# Altium PCB Breadboard Power Module.PcbDoc
Units mm, origin at the board's own origin, x right, y up, seen from the top; angles counter-clockwise.
Board outline 52.8 x 32.65 mm, 2 copper layers (Top Layer, Bottom Layer); 21 components, 10 nets, 60 pads, 24 vias.
Unrouted connection lines stored in the file: 31.
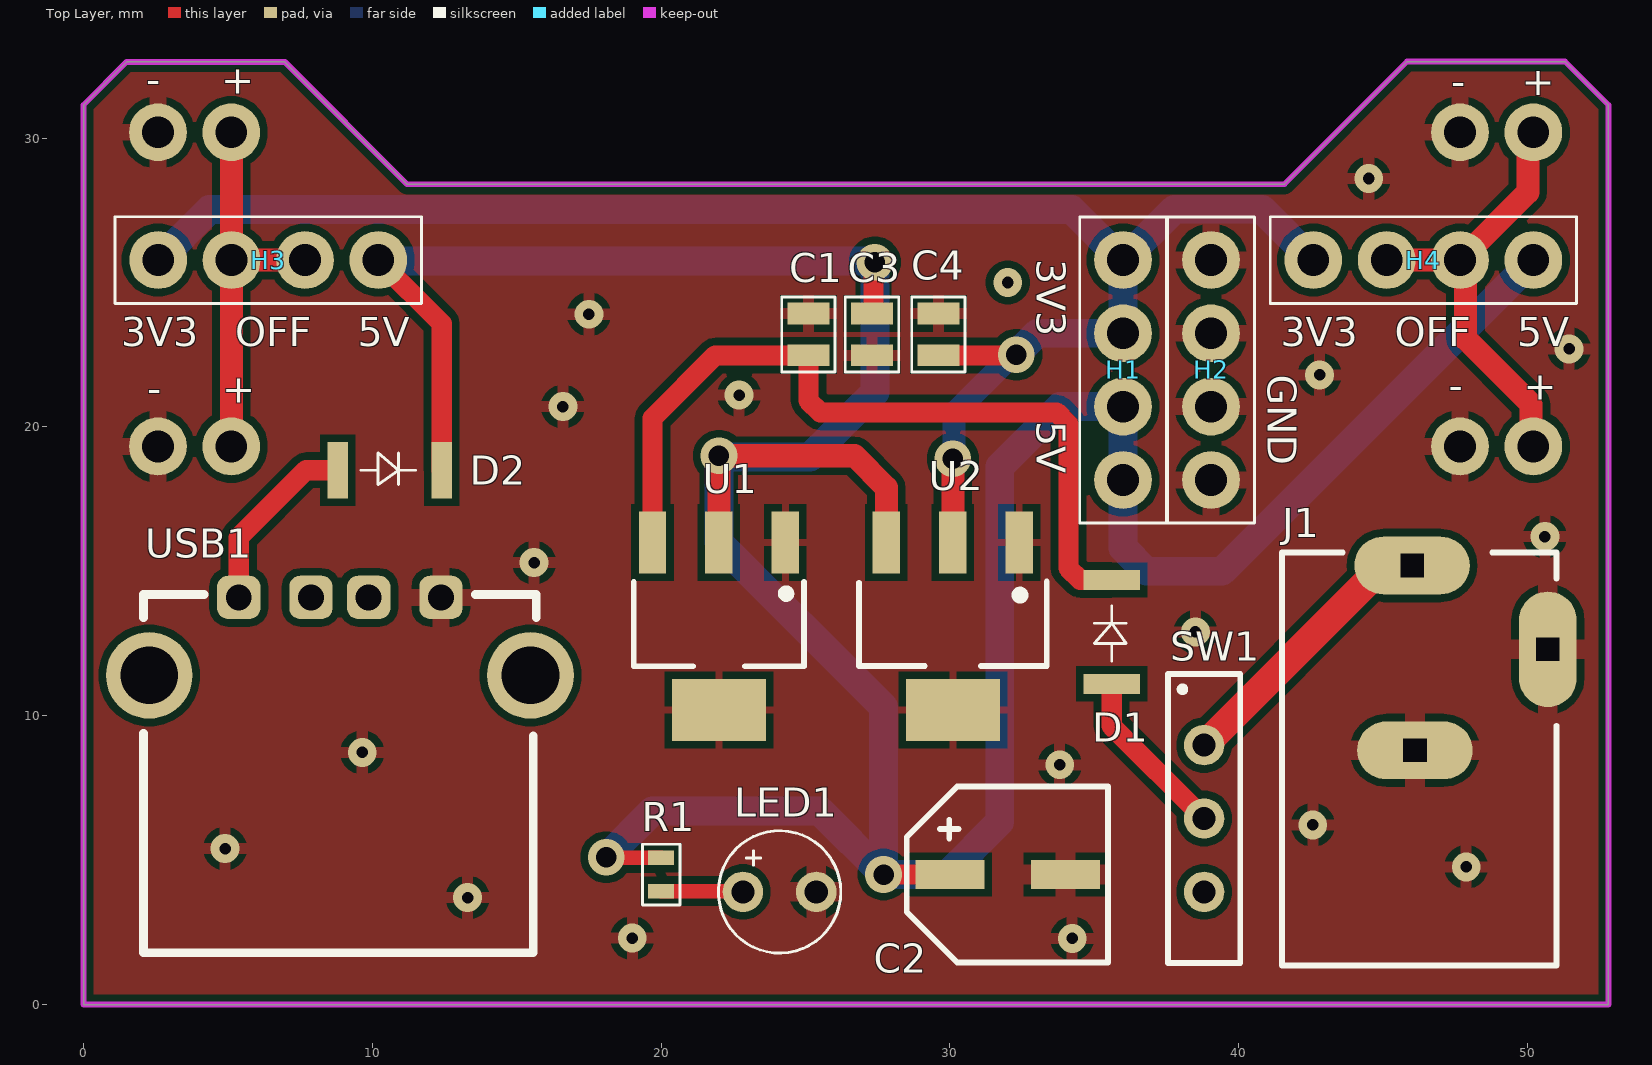
[diagram p0: Top Layer view]
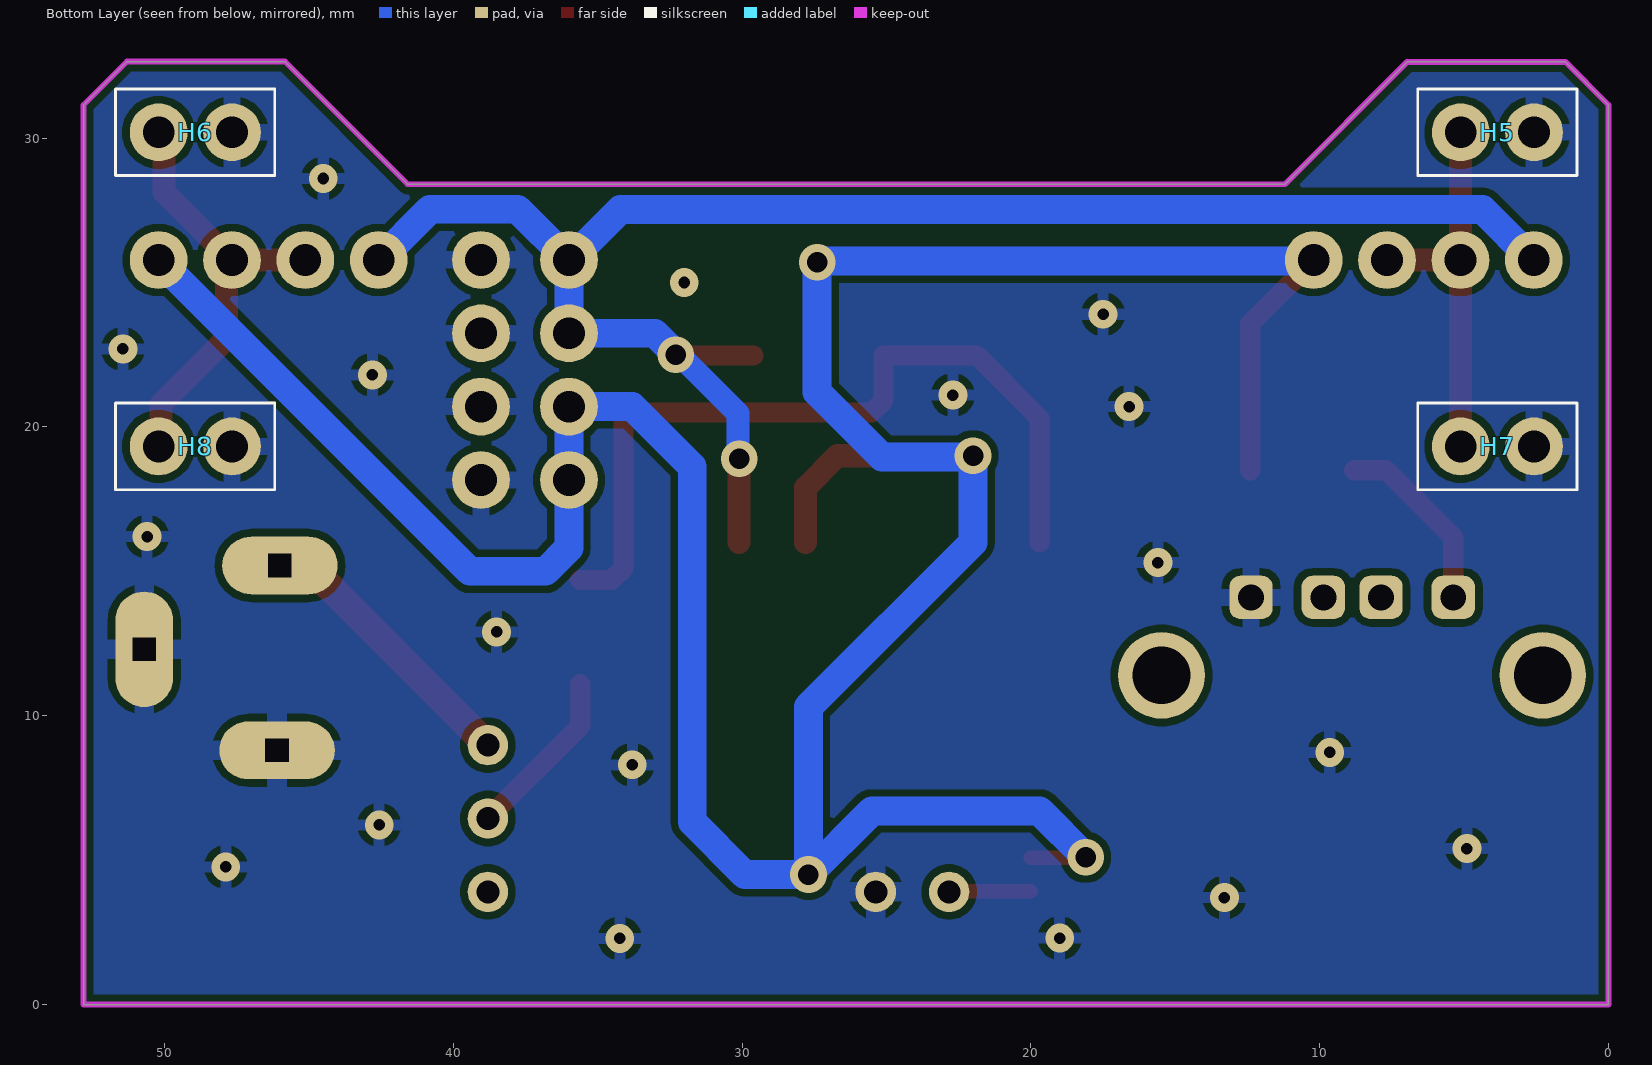
[diagram p1: Bottom Layer view, seen from below]

## Layer stack, top to bottom
Top Solder: solder mask 0.0102, Solder Resist, Dk 3.5
Top Layer: signal copper 0.0356
Dielectric 1: dielectric 0.32, FR-4, Dk 4.8
Bottom Layer: signal copper 0.0356
Bottom Solder: solder mask 0.0102, Solder Resist, Dk 3.5

## Board outline
0,0 0,31.15 1.489,32.639 6.964,32.639 11.203,28.4 41.575,28.4 41.586,28.411 45.825,32.65 51.3,32.65 52.8,31.15 52.8,0

## Design rules (kind name [scope] priority, off if disabled: settings)
Clearance [All] p1: gap=0.254 ignorepadtopadclearanceinfootprint=FALSE except(0: Arc-Hole Track-Hole SMDPad-Hole THPad-Hole Via-Hole Fill-Hole Poly-Hole Region-Hole Text-Hole)
PolygonConnect [All] p1: connectstyle=Relief reliefconductorwidth=0.254 reliefentries=4 polygonreliefangle="90 Angle" airgapwidth=0.254
RoutingVias [All] p1: holewidth=0.711 width=1.27 viastyle="Through Hole" minholewidth=0.711 minwidth=1.27 maxholewidth=0.711 maxwidth=1.27
SolderMaskExpansion [All] p1: expansion=0.102 istentingtop=FALSE
Width [All] p1: maxlimit=20 minlimit=0.254 preferedwidth=1 minimp=50.000000 maximp=50.000000 favimp=50.000000
30 further rules are at their usual default settings.

## Components (designator, comment, footprint, x,y, rotation, side; value= is the part's Value field where it differs from the comment)
C1 "CC0805KRX7R9BB104" "CAP 0805" 25.1,23.2 r270 top value=0.1uF
C2 "EEH-ZC1V470P" "CAP ALUM" 32,4.5 r0 top value=47uF
C3 "CC0805KRX7R9BB104" "CAP 0805" 27.3,23.2 r90 top value=0.1uF
C4 "CC0805KRX7R9BB104" "CAP 0805" 29.6,23.2 r270 top value=100nF
D1 "MBR230LSFT1G" DIODE 35.6,12.9 r90 top value=6pF
D2 "MBR230LSFT1G" DIODE 10.6,18.5 r0 top value=6pF
H1 "61300411121" "HEADER 4 POS" 35.993,21.971 r90 top
H2 "61300411121" "HEADER 4 POS" 39.041,21.971 r90 top
H3 "61300411121" "HEADER 4 POS" 6.395,25.775 r180 top
H4 "61300411121" "HEADER 4 POS" 46.39,25.775 r180 top
H5 "61300211121" "HEADER 2 POS" 3.845,30.2 r180 bottom
H6 "61300211121" "HEADER 2 POS" 48.93,30.2 r180 bottom
H7 "61300211121" "HEADER 2 POS" 3.845,19.325 r180 bottom
H8 "61300211121" "HEADER 2 POS" 48.93,19.325 r180 bottom
J1 "54-00167" "POWER JACK" 44.7,11.6 r270 top
LED1 "151031VS06000" "LED DIODE" 24.1,3.9 r0 top
R1 "RC0603JR-07180RL" "RES 0603" 20,4.5 r90 top value=180R
SW1 "450301014042" "SLIDE SWITCH" 38.8,6.44 r270 top
U1 "AMS1117-5.0" "LDO 5V" 22,13.1 r180 top
U2 "AMS1117-3.3" "LDO 3V3" 30.1,13.1 r180 top
USB1 "USB-A1HSW6" USB 8.874,14.097 r0 top

## Footprints (in the part's own frame and the unit in brackets; to place one, negate y for a bottom-side part, rotate by r counter-clockwise, add the part's x,y. Pads: shape width x height; smd on the part's side, far side on the other; paste and mask are expansions set on the pad)
"CAP 0805" [mm]
  rect 0.75x1.45 smd mask+0.102: 1(-0.725,0) 2(0.725,0)
  silkscreen extent -1.3,-0.92 1.3,0.92, body extent -1,-0.61 1,0.61, height 0.71
"CAP ALUM" [mm]
  rect 2.4x1 smd mask+0.05: 1(-2,0) 2(2,0)
  silkscreen extent -3.5,-3.05 3.47,3.05, body extent -3,-2.65 3,2.65, height 5.8
DIODE [mm]
  rect 0.7x1.95 smd mask+0.102: 1(-1.8,0) 2(1.8,0)
  silkscreen extent -1,-0.5 0.9,0.6, body extent -1.93,-0.98 1.93,0.98, height 1.4
"HEADER 2 POS" [mm]
  round 2 hole 1.1 mask+0.102: 1(-1.27,0) 2(1.27,0)
  silkscreen extent -2.76,-1.5 2.75,1.5, body extent -2.54,-1.27 2.54,1.27, height 8.57
"HEADER 4 POS" [mm]
  round 2 hole 1.1 mask+0.102: 1(-3.81,0) 2(-1.27,0) 3(1.27,0) 4(3.81,0)
  silkscreen extent -5.3,-1.5 5.3,1.5, body extent -5.08,-1.27 5.08,1.27, height 8.57
"LDO 3V3" [mm]
  rect 0.95x2.15 smd mask+0.102: 1(-2.3,-2.9) 2(0,-2.9) 3(2.3,-2.9)
  rect 3.25x2.15 smd mask+0.102: 1(0,2.9)
  silkscreen extent -3.25,-1.55 3.25,1.38, body extent -3.25,-3.5 3.25,3.5, height 1.8
"LDO 5V" [mm]
  rect 0.95x2.15 smd mask+0.102: 1(-2.3,-2.9) 2(0,-2.9) 3(2.3,-2.9)
  rect 3.25x2.15 smd mask+0.102: 1(0,2.9)
  silkscreen extent -2.95,-1.53 2.95,1.39, body extent -3.25,-3.5 3.25,3.5, height 1.8
"LED DIODE" [mm]
  round 1.4 hole 0.8 mask+0.102: 1(-1.27,0) 2(1.27,0)
  silkscreen extent -2.12,-2.12 2.12,2.12, body extent -1.92,-1.92 1.65,1.92, height 5.5
"POWER JACK" [mm]
  oval 2x4 hole 0.8 square mask+0.05: 1(-3.6,1.3) 2(2.8,1.4)
  oval 4x2 hole 0.8 square mask+0.05: 3(-0.7,6)
  silkscreen extent -4.05,-3.2 10.25,6.3, body extent -4.05,-3.2 10.25,6.3, height 11
"RES 0603" [mm]
  rect 0.5x0.9 smd mask+0.102: 1(-0.575,0) 2(0.575,0)
  silkscreen extent -1.05,-0.65 1.05,0.65, body extent -0.77,-0.4 0.77,0.4, height 0.44
"SLIDE SWITCH" [mm]
  round 1.4 hole 0.8 mask+0.102: 1(-2.54,0) 2(0,0) 3(2.54,0)
  silkscreen extent -5,-1.25 5,1.25, body extent -5,-1.25 5,1.25, height 6.4
USB [mm]
  rrect50% 1.5x1.5 hole 0.9 mask+0.102: 1(-3.5,0) 2(-1,0) 3(1,0) 4(3.5,0)
  round 3 hole 2 mask+0.102: 5(-6.6,-2.7) 6(6.6,-2.7)
  silkscreen extent -6.8,-12.3 6.8,0.1, body extent -7.9,-13 7.9,1.1, height 7.6

## Part data
C1 C3 C4: library part "CAP CER 0.1uF 0805", "CAP CER 0.1UF 50V X7R 0805", Case Code (Metric)=2012, Case Code (Imperial)=0805, Dielectric=X7R, Manufacturer=Yageo, Max Operating Temperature=125°C, Min Operating Temperature=-55°C, Package Quantity=4000, Supplier Part Number=311-1140-1-ND, Tolerance=10%, Voltage=50V, Insulation Resistance=100GR, Case/Package=0805, Category="Ceramic Capacitors", ComponentLink1Description=https://datasheet.ciiva.com/11786/0900766b80d84f1d-11786009.pdf?src-supplier=Rs, ComponentLink1URL=https://datasheet.ciiva.com/11786/0900766b80d84f1d-11786009.pdf?src-supplier=Rs, ComponentLink2Description=https://datasheet.ciiva.com/46393/1734573-46393307.pdf?src-supplier=Element14, ComponentLink2URL=https://datasheet.ciiva.com/46393/1734573-46393307.pdf?src-supplier=Element14, ComponentLink3Description=https://datasheet.ciiva.com/155/mlccorderingcode-155930.pdf?src-supplier=Digikey, ComponentLink3URL=https://datasheet.ciiva.com/155/mlccorderingcode-155930.pdf?src-supplier=Digikey, ComponentLink4Description=https://datasheet.ciiva.com/28450/1489800-28450805.pdf?src-supplier=Element14, ComponentLink4URL=https://datasheet.ciiva.com/28450/1489800-28450805.pdf?src-supplier=Element14, ComponentLink5Description=https://datasheet.ciiva.com/155/mlccorderingcode-155929.pdf?src-supplier=Digikey, ComponentLink5URL=https://datasheet.ciiva.com/155/mlccorderingcode-155929.pdf?src-supplier=Digikey, ComponentLink6Description=https://datasheet.ciiva.com/155/mlccorderingcode-155931.pdf?src-supplier=Digikey, ComponentLink6URL=https://datasheet.ciiva.com/155/mlccorderingcode-155931.pdf?src-supplier=Digikey, ComponentLink7Description=https://datasheet.ciiva.com/11464/upy-gphc-x7r-6-3v-to-50v-8-11464757.pdf?src-supplier=Avnet, ComponentLink7URL=https://datasheet.ciiva.com/11464/upy-gphc-x7r-6-3v-to-50v-8-11464757.pdf?src-supplier=Avnet, ComponentLink8Description=https://datasheet.ciiva.com/29242/445210-da-01-en-kerko-chip-0805-x7r-0-1uf-10proz-50vg-29242074.pdf?src-supplier=Conrad, ComponentLink8URL=https://datasheet.ciiva.com/29242/445210-da-01-en-kerko-chip-0805-x7r-0-1uf-10proz-50vg-29242074.pdf?src-supplier=Conrad, Depth=1.25mm, Halogen Free=5694HalogenFree, Height=0.85mm, Lead Free=5697LeadFree, Length=2mm, Manufacturer Part Number=CC0805KRX7R9BB104, Material=Ceramic, Mounting Technology="Surface Mount", Packaging="Tape and Reel", Pins=2, Pricing="1=0,1, 10=0,058, 50=0,0396, 100=0,0341, 500=0,0248, 1000=0,02191, 4000=0,01754, 8000=0,01591, 12000=0,01509, 20000=0,01417, 28000=0,01364, 40000=0,01312, 100000=0,012, 200000=0,01132, 400000=0,01076 (USD)", Radiation Hardening=No, Reach SVHC Compliant=No, RoHS=Yes, RoHS Compliant=Yes, Series=CC, Stock=4302952, Supplier=Digikey, Termination=SMD/SMT, Voltage Rating=50V
C2: library part "CAP ALUM 47uF SMD", "CAP ALUM 47UF 20% 35V SMD"
D1 D2: library part "DIODE SMD", "DIODE SCHOTTKY 30V 2A", Forward Current=1A, Manufacturer="Sangdest Microelectronics", Manufacturer Part Number=1N4007FL, Max Forward Surge Current (Ifsm)=30A, Max Operating Temperature=150°C, Max Repetitive Reverse Voltage (Vrrm)=1kV, Max Reverse Current=5uA, Min Operating Temperature=-55°C, Supplier Part Number=1655-1N4007FLCT-ND, Category=Diodes, Height=1.1mm, Pricing="1=0,1, 10=0,058, 100=0,039, 500=0,02954, 1000=0,02627 (USD)", Reverse Voltage=1kV, RoHS=No, Stock=333059, Supplier=Digikey
H1 H2 H3 H4: library part "HEADER TH 4 POS", "CONN HEADER VERT 4POS 2.54MM", Color=Black, Contact Resistance=20mR, Current Rating=3A, Manufacturer="Wurth Electronics", Max Operating Temperature=105°C, Min Operating Temperature=-40°C, Operating Supply Voltage=250V, Supplier Part Number=732-5317-ND, Category="Headers and Wire Housings", ComponentLink1Description=http://www.farnell.com/cad/1737268.pdf?src-supplier=Element14, ComponentLink1URL=http://www.farnell.com/cad/1737268.pdf?src-supplier=Element14, ComponentLink2Description=https://datasheet.octopart.com/61300411121-W%C3%BCrth-Elektronik-datasheet-21154836.pdf?src-supplier=Element14, ComponentLink2URL=https://datasheet.octopart.com/61300411121-W%C3%BCrth-Elektronik-datasheet-21154836.pdf?src-supplier=Element14, ComponentLink3Description=https://katalog.we-online.de/em/datasheet/6130xx11121.pdf?src-supplier=Digikey, ComponentLink3URL=https://katalog.we-online.de/em/datasheet/6130xx11121.pdf?src-supplier=Digikey, Contact Material=Copper, Contact Mating Length=0.236inch, Contact Plating=Gold, Contact Type="Male Pin", Gender=29Gender, Height=8.89mm, Lead Free=5697LeadFree, Manufacturer Part Number=61300411121, Mounting Technology="Through Hole", Number of Contacts=4, Number of Positions=4, Number of Rows=1, Orientation=5495OrientationType, Packaging=Bulk, Pitch=0.1inch, Pricing="1=0,19, 10=0,163, 25=0,1352, 50=0,113, 100=0,102, 1000=0,094 (USD)", Reach SVHC Compliant=Unknown, RoHS=Yes, RoHS Compliant=Yes, Series=WR-PHD, Stock=35642, Supplier=Digikey, Termination=Solder, Voltage Rating=250V
H5 H6 H7 H8: library part "HEADER TH 2 POS", "CONN HEADER VERT 2POS 2.54MM"
J1: library part "POWER JACK", "CONN JACK R/A PCB 5.5X2.5MM", ComponentLink1Description=https://datasheet.ciiva.com/26837/getdatasheetpartid-572408-26837414.pdf?src-supplier=Verical, ComponentLink1URL=https://datasheet.ciiva.com/26837/getdatasheetpartid-572408-26837414.pdf?src-supplier=Verical, ComponentLink2Description=https://datasheet.ciiva.com/16318/typ-4840-1200-16318967.pdf?src-supplier=Future+Electronics, ComponentLink2URL=https://datasheet.ciiva.com/16318/typ-4840-1200-16318967.pdf?src-supplier=Future+Electronics, ComponentLink3Description=https://datasheet.ciiva.com/12342/typ-4840-2201-65401-12342879.pdf?src-supplier=Mouser, ComponentLink3URL=https://datasheet.ciiva.com/12342/typ-4840-2201-65401-12342879.pdf?src-supplier=Mouser, ComponentLink4Description=https://datasheet.ciiva.com/391/typ-4840-2201-391834.pdf?src-supplier=Digikey, ComponentLink4URL=https://datasheet.ciiva.com/391/typ-4840-2201-391834.pdf?src-supplier=Digikey
LED1: library part "GREEN LED TH", "LED GREEN 3MM ROUND T/H", Case/Package=Radial, Color=Green, Forward Current=30mA, Forward Voltage=2.2V, Manufacturer="Wurth Electronics", Max Operating Temperature=85°C, Max Reverse Voltage (DC)=5V, Min Operating Temperature=-40°C, Supplier Part Number=732-5008-ND, Test Current=20mA, Category=LEDs, ComponentLink1Description=https://datasheet.ciiva.com/22657/151031vs06000-22657015.pdf?src-supplier=Element14, ComponentLink1URL=https://datasheet.ciiva.com/22657/151031vs06000-22657015.pdf?src-supplier=Element14, ComponentLink2Description=https://datasheet.ciiva.com/29363/759487-da-01-en-tht-led-3mm-b-gruen-151031vs06000-29363829.pdf?src-supplier=Conrad, ComponentLink2URL=https://datasheet.ciiva.com/29363/759487-da-01-en-tht-led-3mm-b-gruen-151031vs06000-29363829.pdf?src-supplier=Conrad, Dominant Wavelength=568nm, Height=5.55mm, Lead Free="Lead Free", Length=3mm, Lens Color=Green, Lens Size=3mm, Lens Style=Round,Domed,Circular, Lens Transparency=Diffused, Luminous Intensity=30mcd, Manufacturer Part Number=151031VS06000, Mounting Technology="Through Hole", Pricing="1=0,16, 50=0,155, 100=0,133, 500=0,115 (USD)", Reach SVHC Compliant=Unknown, RoHS=Yes, RoHS Compliant=Yes, Series=WL-TMRC, Stock=21165, Supplier=Digikey, Viewing Angle=60°, Wavelength=568nm, Width=3mm
R1: library part "RES 180 OHM 0603", "RES 180 OHM 5% 1/10W 0603", Case/Package=0603, Manufacturer="Stackpole Electronics", Manufacturer Part Number=RNCF0603DTE330R, Max Operating Temperature=155°C, Min Operating Temperature=-55°C, Power Rating=63mW, Supplier Part Number=738-RNCF0603DTE330RDKR-ND, Tolerance=0.5%, Category="Chip SMD Resistors", ComponentLink1Description=https://www.seielect.com/catalog/sei-rncf.pdf?src-supplier=Digikey, ComponentLink1URL=https://www.seielect.com/catalog/sei-rncf.pdf?src-supplier=Digikey, Mounting Technology="Surface Mount", Packaging="Tape and Reel", Pricing="1=0,1, 10=0,049, 50=0,039, 100=0,0352, 500=0,02744, 1000=0,02453 (USD)", RoHS=Yes, RoHS Compliant=Yes, Stock=31710, Supplier=Digikey
SW1: library part "SLIDE SWITCH", "SWITCH SLIDE SPDT 500MA 12V", Manufacturer="Wurth Electronics", Supplier Part Number=450301014042-ND, Category="Slide Switches", ComponentLink1Description=https://datasheet.ciiva.com/7638/450301014042-7638130.pdf?src-supplier=Element14, ComponentLink1URL=https://datasheet.ciiva.com/7638/450301014042-7638130.pdf?src-supplier=Element14, ComponentLink2Description=https://datasheet.ciiva.com/30466/0900766b8126a6c7-30466803.pdf?src-supplier=Rs, ComponentLink2URL=https://datasheet.ciiva.com/30466/0900766b8126a6c7-30466803.pdf?src-supplier=Rs, ComponentLink3Description=https://datasheet.ciiva.com/29124/711770-da-01-en-mini-schiebeschalter-450301014042-29124009.pdf?src-supplier=Conrad, ComponentLink3URL=https://datasheet.ciiva.com/29124/711770-da-01-en-mini-schiebeschalter-450301014042-29124009.pdf?src-supplier=Conrad, Manufacturer Part Number=450301014042, Pricing="1=2,25, 10=2,091, 50=1,9, 100=1,728, 200=1,503, 400=1,344 (USD)", RoHS=Yes, Stock=2836, Supplier=Digikey
U1: library part "LDO 5V SMD", "IC LDO REG 5V 1A SOT223", ComponentLink1Description=https://datasheet.ciiva.com/36525/1390266-36525981.pdf?src-supplier=Jameco, ComponentLink1URL=https://datasheet.ciiva.com/36525/1390266-36525981.pdf?src-supplier=Jameco, ComponentLink2Description=https://datasheet.ciiva.com/1511/1776449-1511575.pdf?src-supplier=Element14, ComponentLink2URL=https://datasheet.ciiva.com/1511/1776449-1511575.pdf?src-supplier=Element14, ComponentLink3Description=https://datasheet.ciiva.com/2041/cd00000544-2041930.pdf?src-supplier=Digikey, ComponentLink3URL=https://datasheet.ciiva.com/2041/cd00000544-2041930.pdf?src-supplier=Digikey, ComponentLink4Description=https://datasheet.ciiva.com/2041/cd00000544-2041929.pdf?src-supplier=Digikey, ComponentLink4URL=https://datasheet.ciiva.com/2041/cd00000544-2041929.pdf?src-supplier=Digikey, ComponentLink5Description=https://datasheet.ciiva.com/2041/cd00000544-2041931.pdf?src-supplier=Digikey, ComponentLink5URL=https://datasheet.ciiva.com/2041/cd00000544-2041931.pdf?src-supplier=Digikey, ComponentLink6Description=https://datasheet.ciiva.com/22694/1776449-22694853.pdf?src-supplier=Element14, ComponentLink6URL=https://datasheet.ciiva.com/22694/1776449-22694853.pdf?src-supplier=Element14, ComponentLink7Description=https://datasheet.ciiva.com/7992/1776449-7992623.pdf?src-supplier=Element14, ComponentLink7URL=https://datasheet.ciiva.com/7992/1776449-7992623.pdf?src-supplier=Element14
U2: library part "LDO 3V3 SMD", "IC LDO REG 3.3V 1A SOT223", ComponentLink1Description=https://datasheet.ciiva.com/2060/tlv1117lv-2060227.pdf?src-supplier=Digikey, ComponentLink1URL=https://datasheet.ciiva.com/2060/tlv1117lv-2060227.pdf?src-supplier=Digikey, ComponentLink2Description=https://datasheet.ciiva.com/2060/tlv1117lv-2060228.pdf?src-supplier=Digikey, ComponentLink2URL=https://datasheet.ciiva.com/2060/tlv1117lv-2060228.pdf?src-supplier=Digikey, ComponentLink3Description=https://datasheet.ciiva.com/2060/tlv1117lv-2060226.pdf?src-supplier=Digikey, ComponentLink3URL=https://datasheet.ciiva.com/2060/tlv1117lv-2060226.pdf?src-supplier=Digikey, ComponentLink4Description=https://datasheet.ciiva.com/46443/1857581-46443437.pdf?src-supplier=Element14, ComponentLink4URL=https://datasheet.ciiva.com/46443/1857581-46443437.pdf?src-supplier=Element14, ComponentLink5Description=https://datasheet.ciiva.com/46443/1857581-46443438.pdf?src-supplier=Element14, ComponentLink5URL=https://datasheet.ciiva.com/46443/1857581-46443438.pdf?src-supplier=Element14, ComponentLink6Description=https://datasheet.ciiva.com/46443/1857581-46443450.pdf?src-supplier=Element14, ComponentLink6URL=https://datasheet.ciiva.com/46443/1857581-46443450.pdf?src-supplier=Element14
USB1: library part "USB TYPE-A", "CONN RCPT TYPEA 4POS R/A", Flammability Rating="UL94 V-0", Manufacturer="On-Shore Technology", Max Operating Temperature=85°C, Min Operating Temperature=0°C, Supplier Part Number=ED2989-ND, Insulation Color=White, Category="USB Connectors", ComponentLink1Description=https://datasheet.ciiva.com/851/usb-a1hsxx-851712.pdf?src-supplier=Digikey, ComponentLink1URL=https://datasheet.ciiva.com/851/usb-a1hsxx-851712.pdf?src-supplier=Digikey, Connector Type=USB, Contact Plating=Gold, Gender=Receptacle, Manufacturer Part Number=USB-A1HSW6, Mounting Technology="Through Hole,Horizontal", Number of Contacts=4, Number of Ports=1, Packaging=Tray, Pricing="1=0,67, 10=0,511, 25=0,4592, 60=0,41517, 120=0,38358, 240=0,35492, 480=0,32881, 960=0,30511, 2400=0,27713 (USD)", RoHS=Yes, RoHS Compliant=Yes, Series=-, Shielding=Unshielded, Stock=13920, Supplier=Digikey, Termination=Solder

## Via types
v1: diameter 1, hole 0.4, Top Layer to Bottom Layer, tented both sides, 18 vias
v2: diameter 1.27, hole 0.711, Top Layer to Bottom Layer, tented both sides, 6 vias

## Nets (pads, with @x,y where several pads share a name; then routed paths per layer and width w, separated by ;. In a path a pad name is that pad's centre, name@x,y a point inside that pad or via, vN(x,y) a via of type N, cw(c..) or ccw(c..) an arc to the next point about the centre after c; other vN are vias at no path point)
3V3: C4.2 H1.3 H1.4 H3.4 H4.4 U2.2 | length 59.6
  Top Layer w0.7: C4.2 v2@32.275,22.475
  Top Layer w0.8: U2.2 v2(30.1,18.9)
  Bottom Layer w0.8: v2(30.1,18.9) 30.135,18.935 30.135,20.462 32.173,22.5 v2(32.3,22.5)
  Bottom Layer w1: H3.4 2.613,25.775 4.367,27.529 34.205,27.529 35.953,25.781 H1.4 ; v2(32.3,22.5) 32.3,22.52 33.021,23.241 H1.3 H1.4 ; H4.4 42.564,25.775 40.804,27.535 37.775,27.535 36.021,25.781 H1.4
5V: C2.1 C3.2 D2.2 H1.1 H1.2 H3.1 H4.1 R1.2 U1.2 U2.3 | length 127.5
  Top Layer w0.5: v2(18.1,5.1) 18.125,5.075 R1.2
  Top Layer w0.7: H3.1 12.4,23.58 D2.2 ; C3.2 27.325,23.925 27.35,23.95 27.35,25.65 v2(27.4,25.7) ; v2(27.7,4.5) C2.1
  Top Layer w0.8: U1.2 v2(22,19) 26.7,19 27.8,17.9 U2.3
  Bottom Layer w1: H3.1@10.243,25.737 27.363,25.737 v2(27.4,25.7) 27.4,21.2 25.152,18.952 22.048,18.952 v2(22,19) 22,16 27.7,10.3 v2(27.7,4.5) ; v2(18.1,5.1) 19.7,6.7 25.5,6.7 v2(27.7,4.5) ; H4.1 39.425,15 36.8,15 35.993,15.807 H1.1 H1.2 33.801,20.701 31.724,18.624 31.724,6.324 29.9,4.5 v2(27.7,4.5)
GND: C1.1 C2.2 C3.1 C4.1 H2.1 H2.2 H2.3 H2.4 H5.2 H6.2 H7.2 H8.2 J1.2 J1.3 LED1.2 U1.1 U2.1 USB1.4
  other v1: 34.232,2.29 19,2.3 13.3,3.7 47.874,4.764 4.9,5.4 42.563,6.219 33.8,8.3 9.65,8.73 38.5,12.9 15.6,15.3 50.6,16.2 16.6,20.7 22.7,21.1 42.8,21.8 51.44,22.698 17.5,23.9 44.5,28.6
NetC1_2: C1.2 D1.2 U1.3 | length 28.2
  Top Layer w0.7: U1.3 19.7,20.3 21.875,22.475 C1.2 25.1,20.91 25.51,20.5 33.69,20.5 34.1,20.09 34.1,15.11 34.51,14.7 D1.2
NetD1_1: D1.1 SW1.2 | length 6
  Top Layer w0.7: D1.1 35.6,9.64 SW1.2
NetD2_1: D2.1 USB1.1 | length 6.5
  Top Layer w0.7: USB1.1 5.374,16.174 7.7,18.5 D2.1
NetH3_2: H3.2 H3.3 H5.1 H7.1 | length 13.4
  Top Layer w0.8: H7.1 5.12,19.33 5.12,25.77 H3.3 ; H5.1 5.12,30.195 5.12,25.78 H3.3 ; H3.2 H3.3
NetH4_2: H4.2 H4.3 H6.1 H8.1 | length 15.5
  Top Layer w0.8: H4.3 H4.2 ; H8.1 50.12,19.405 50.12,20.78 47.851,23.049 47.851,25.584 H4.2 ; H6.1 50.009,30.009 50.009,28.124 H4.2
NetLED1_1: LED1.1 R1.1 | length 2.8
  Top Layer w0.5: R1.1 22.805,3.925 LED1.1
VIN: J1.1 SW1.1 | length 9.8
  Top Layer w1: SW1.1 45.02,15.2 J1.1
pads on no net: SW1.3 USB1.2 USB1.3 USB1.5 USB1.6
copper on no net:
  other v1: 32,25

## Polygon pours and split planes (outlines as drawn)
GND on Bottom Layer "GND_L02_P002" (solid, remove dead copper, pour order 2): 1.5,32.5 6.95,32.5 11.15,28.3 41.625,28.3 45.85,32.525 51.275,32.525 52.7,31.1 52.7,0.1 0.1,0.1 0.1,31.1
GND on Top Layer "GND_L01_P003" (solid, remove dead copper, pour order 3): 1.5,32.5 6.95,32.5 11.15,28.3 41.625,28.3 45.85,32.525 51.275,32.525 52.7,31.1 52.7,0.1 0.1,0.1 0.1,31.1

## Keep-outs
Keep-Out Layer:
  the board outline again, w0.2

## Silkscreen, mask and mechanical layers (free items; w line width, h text height)
Top Overlay:
  text "-" at 2.175,31.55 h1
  text "+" at 4.775,31.533 h1
  text "+" at 49.8,31.483 h1
  text "-" at 47.35,31.475 h1
  text "3V3" at 33,25.8 h1 r270
  text "3V3" at 1.3,22.8 h1
  text "OFF" at 5.25,22.8 h1
  text "5V" at 9.5,22.8 h1
  text "3V3" at 41.45,22.8 h1
  text "OFF" at 45.4,22.8 h1
  text "5V" at 49.65,22.8 h1
  text "GND" at 41,21.8 h1 r270
  text "-" at 47.275,20.95 h1
  text "+" at 49.875,20.933 h1
  text "-" at 2.2,20.85 h1
  text "+" at 4.8,20.833 h1
  text "5V" at 33,20.2 h1 r270